# Altium PCB I2C_board_PCB.PcbDoc
Units mm, origin at the board's own origin, x right, y up, seen from the top; angles counter-clockwise.
Board outline 40.64 x 48.26 mm, 2 copper layers (Top Layer, Bottom Layer), stack 1.67 mm thick; 11 components, 21 nets, 78 pads, 0 vias.
Unrouted connection lines stored in the file: 18.
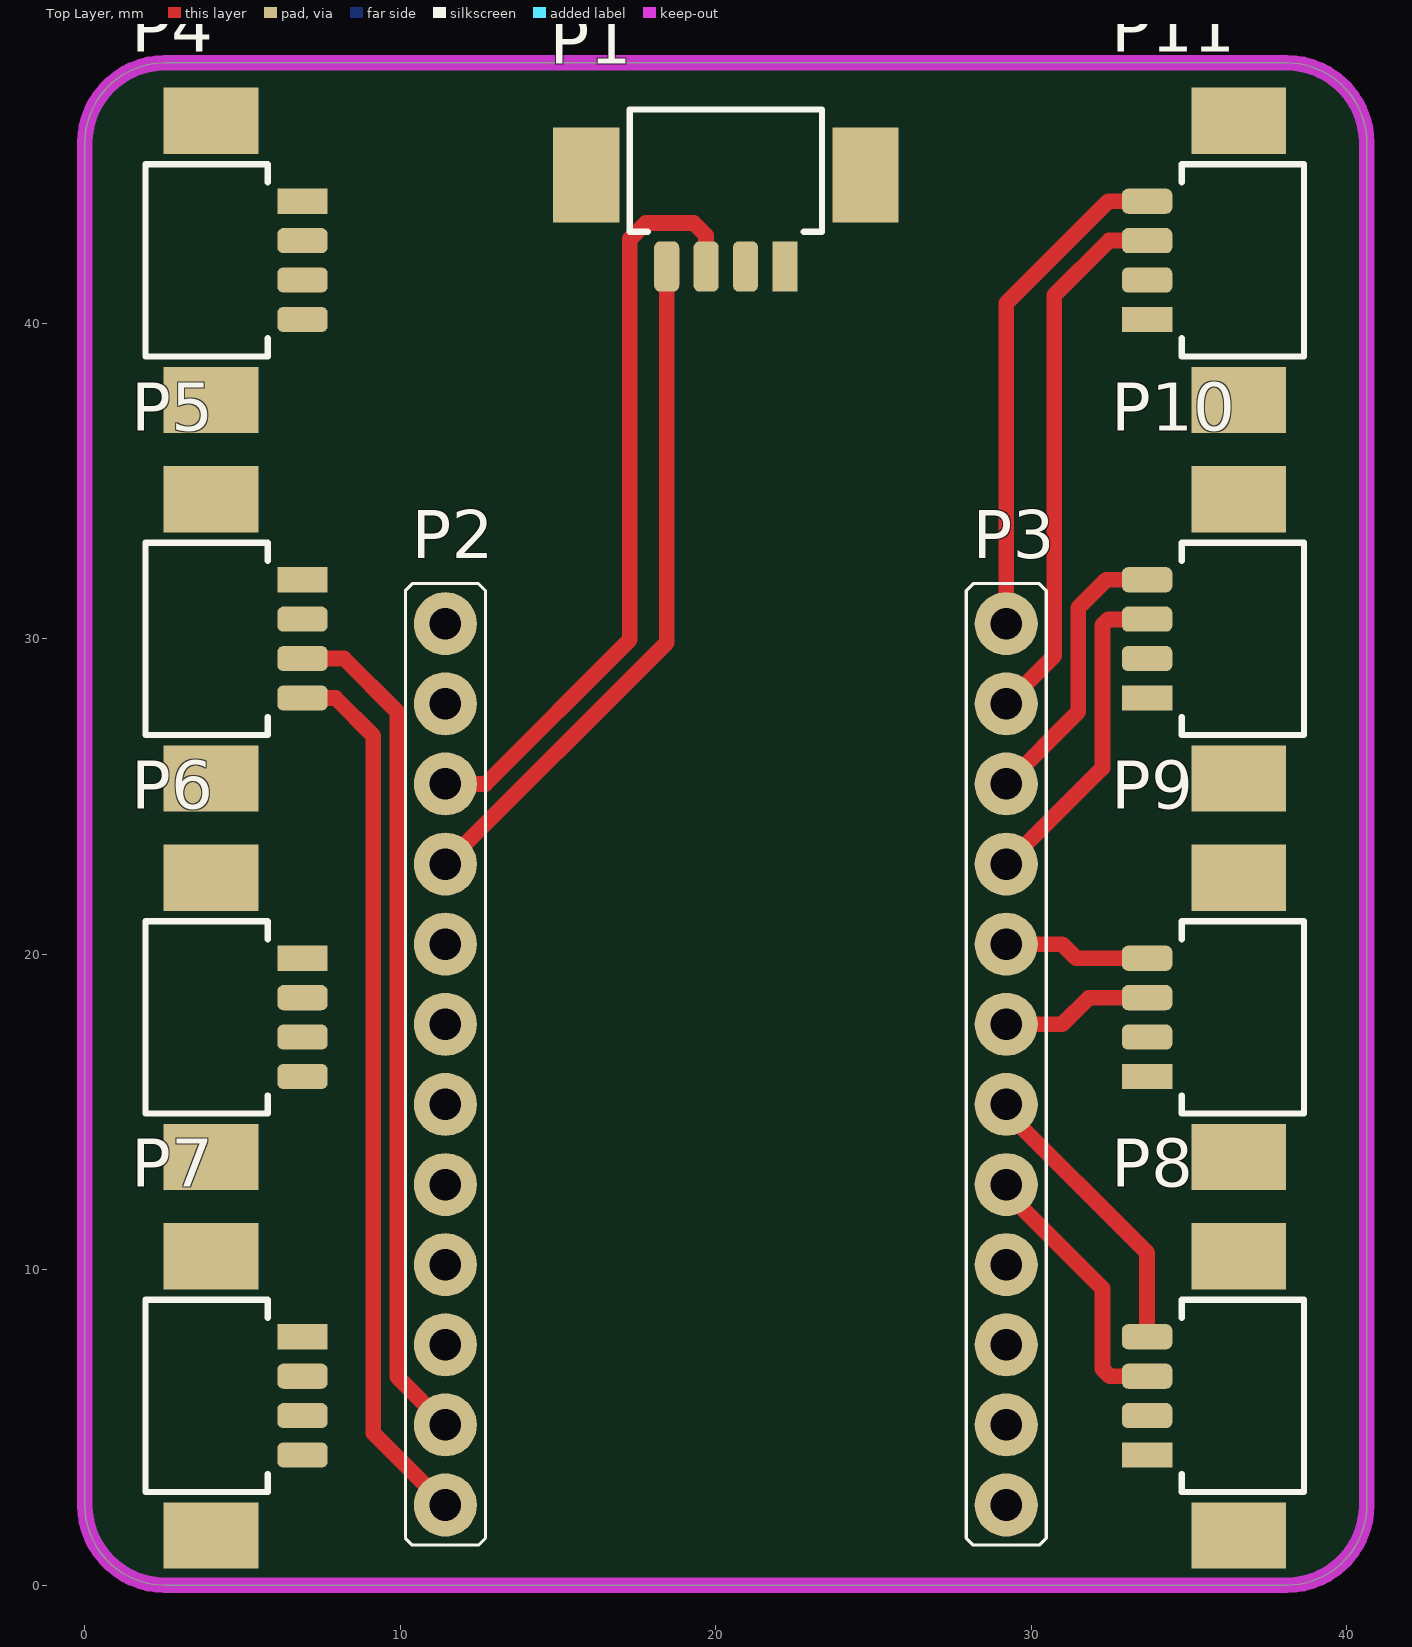
[diagram p0: Top Layer view]
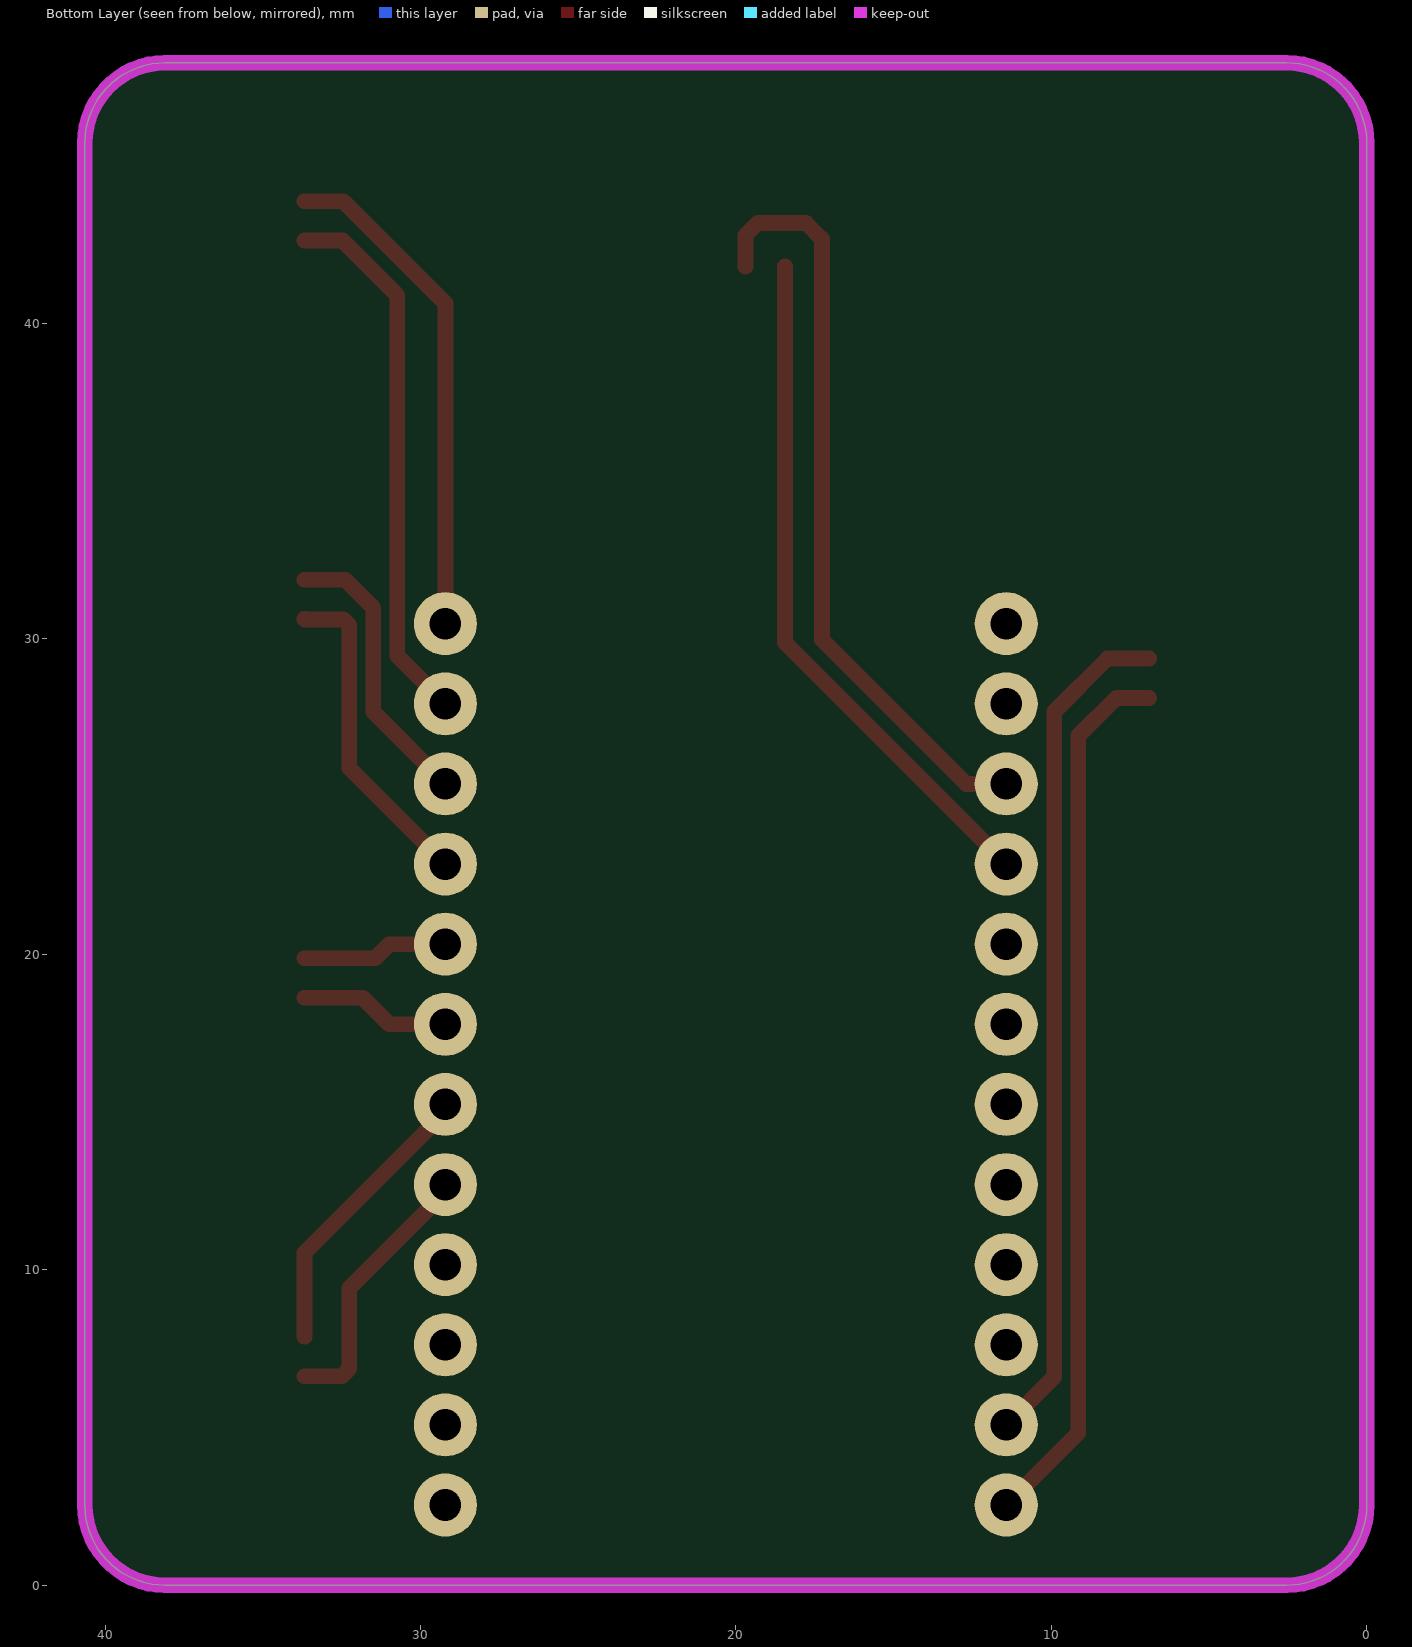
[diagram p1: Bottom Layer view, seen from below]

## Layer stack, top to bottom
Top Solder: solder mask 0.0102, Solder Resist, Dk 3.5
Top Layer: signal copper 0.035
Core: dielectric 1.6, FR-4, Dk 4.6
Bottom Layer: signal copper 0.035
Bottom Solder: solder mask 0.0102, Solder Resist, Dk 3.5

## Board outline
0,2.54 0,45.72 cw(c2.54,45.72) 2.54,48.26 38.1,48.26 cw(c38.1,45.72) 40.64,45.72 40.64,2.54 cw(c38.1,2.54) 38.1,0 2.54,0 cw(c2.54,2.54)

## Design rules (kind name [scope] priority, off if disabled: settings)
BoardOutlineClearance [All] p1: gap=0.2 ignorepadtopadclearanceinfootprint=FALSE except(0: Arc-SplitContinuation Track-SplitContinuation SMDPad-SplitContinuation THPad-SplitContinuation Via-SplitContinuation Fill-SplitContinuation Poly-SplitContinuation Region-SplitContinuation Text-SplitContinuation)
Clearance Clearance_DifferentNets [All] p1: gap=0.127 ignorepadtopadclearanceinfootprint=TRUE except(0.15: Text-Text; 0.2: Arc-SMDPad Arc-THPad Track-SMDPad Track-THPad; 0.254: Arc-Via Track-Via Via-Via; 0.5: THPad-Via)
Clearance Clearance_SameNets [All] p2: gap=0.127 ignorepadtopadclearanceinfootprint=TRUE except(0: SMDPad-Fill SMDPad-Poly SMDPad-Region Region-Region; 0.15: Text-Text; 0.2: Arc-SMDPad Arc-THPad Track-SMDPad Track-THPad; 0.254: Arc-Via Track-Via Via-Via)
DiffPairsRouting [All] p1: maxlimit=0.254 minlimit=0.203 mostfreqgap=0.203 toplayer_minwidth=0.261 toplayer_maxwidth=0.381 toplayer_prefwidth=0.261 bottomlayer_minwidth=0.261 bottomlayer_maxwidth=0.381 bottomlayer_prefwidth=0.261 maxuncoupledlength=12.7
HoleSize [All] p1: absolutevalues=TRUE maxlimit=6.3 minlimit=0.2 maxpercent=80.000 minpercent=20.000
HoleToHoleClearance [All] p1: gap=0.5 allowstackedmicrovias=TRUE
MatchedLengths USB [InDifferentialPair('USB')] p1: tolerance=0.1 checknetsindiffpair=TRUE checkdiffpairvsdiffpair=FALSE checkxsignals=FALSE checkothers=FALSE
MinimumAnnularRing [All] p1: minimumring=0.13
MinimumSolderMaskSliver [All] p1: minsoldermaskwidth=0.05
PolygonConnect [All] p1: connectstyle=Relief reliefconductorwidth=0.254 reliefentries=4 polygonreliefangle="45 Angle" airgapwidth=0.254
RoutingVias [All] p1: holewidth=0.3 width=0.6 viastyle="Through Hole" minholewidth=0.2 minwidth=0.4 maxholewidth=6.3 maxwidth=6.35
ShortCircuit [All] p1: allowed=TRUE
SilkToSilkClearance [All] p1: silktosilkclearance=0.15
SolderMaskExpansion [All] p1: expansion=0.05 istentingtop=FALSE useseparateexpansions=TRUE expansionbottom=0.05 istentingbottom=FALSE
UnRoutedNet [All] p1: checkbadconnections=TRUE
Width [All] p1: maxlimit=1 minlimit=0.09 preferedwidth=0.2 minimp=50.000000 maximp=50.000000 favimp=50.000000
23 further rules are at their usual default settings.

## Components (designator, comment, footprint, x,y, rotation, side; value= is the part's Value field where it differs from the comment)
P1 "CONN MOLEX 53261-0471 (father)" "CONN MOLEX 53261-0471 (father)" 20.32,44.704 r180 top value="CONN HEADER SMD R/A 4POS 1.25MM"
P2 "Connector 1x12 0.1\"" "CONN-12 1x12 MALE" 11.43,17.78 r270 top
P3 "Connector 1x12 0.1\"" "CONN-12 1x12 MALE" 29.21,15.24 r90 top
P4 "CONN MOLEX 53261-0471 (father)" "CONN MOLEX 53261-0471 (father)" 4,42 r270 top value="CONN HEADER SMD R/A 4POS 1.25MM"
P5 "CONN MOLEX 53261-0471 (father)" "CONN MOLEX 53261-0471 (father)" 4,30 r270 top value="CONN HEADER SMD R/A 4POS 1.25MM"
P6 "CONN MOLEX 53261-0471 (father)" "CONN MOLEX 53261-0471 (father)" 4,18 r270 top value="CONN HEADER SMD R/A 4POS 1.25MM"
P7 "CONN MOLEX 53261-0471 (father)" "CONN MOLEX 53261-0471 (father)" 4,6 r270 top value="CONN HEADER SMD R/A 4POS 1.25MM"
P8 "CONN MOLEX 53261-0471 (father)" "CONN MOLEX 53261-0471 (father)" 36.576,6 r90 top value="CONN HEADER SMD R/A 4POS 1.25MM"
P9 "CONN MOLEX 53261-0471 (father)" "CONN MOLEX 53261-0471 (father)" 36.576,18 r90 top value="CONN HEADER SMD R/A 4POS 1.25MM"
P10 "CONN MOLEX 53261-0471 (father)" "CONN MOLEX 53261-0471 (father)" 36.576,30 r90 top value="CONN HEADER SMD R/A 4POS 1.25MM"
P11 "CONN MOLEX 53261-0471 (father)" "CONN MOLEX 53261-0471 (father)" 36.576,42 r90 top value="CONN HEADER SMD R/A 4POS 1.25MM"

## Footprints (in the part's own frame and the unit in brackets; to place one, negate y for a bottom-side part, rotate by r counter-clockwise, add the part's x,y. Pads: shape width x height; smd on the part's side, far side on the other; paste and mask are expansions set on the pad)
"CONN MOLEX 53261-0471 (father)" [mm] "R/A"
  rect 0.8x1.6 smd: 1(-1.875,2.9)
  rrect50% 0.8x1.6 smd: 2(-0.625,2.9) 3(0.625,2.9) 4(1.875,2.9)
  rect 2.1x3 smd: 5(-4.425,0) 5(4.425,0)
  silkscreen extent -3.05,-2.08 3.05,1.8, body extent -5.08,-2.08 5.07,3.13, height 3.4
"CONN-12 1x12 MALE" [mm]
  round 2 hole 1: 1(-12.7,0) 2(-10.16,0) 3(-7.62,0) 4(-5.08,0) 5(-2.54,0) 6(0,0) 7(2.54,0) 8(5.08,0) 9(7.62,0) 10(10.16,0) 11(12.7,0) 12(15.24,0)
  silkscreen extent -13.97,-1.27 16.51,1.27, body extent -13.97,-1.27 16.51,1.27, height 8.54

## Part data
P1 P4 P5 P6 P7 P8 P9 P10 P11: Case="Right Angle 4 position 0.049\" (1.25mm)", Manufacturer=Molex, HelpURL=https://www.digikey.com/en/products/detail/molex/0532610471/699096?s=N4IgTCBcDaIKwGYwDYCMBaADAFgOypAF0BfIA, Model=0532610471

## Nets (pads, with @x,y where several pads share a name; then routed paths per layer and width w, separated by ;. In a path a pad name is that pad's centre, name@x,y a point inside that pad or via, vN(x,y) a via of type N, cw(c..) or ccw(c..) an arc to the next point about the centre after c; other vN are vias at no path point)
+5V: P1.2 P2.1 P2.5 P4.2 P5.2 P6.2 P7.2 P8.2 P9.2 P10.2 P11.2
A0: P2.6 P2.7 P2.8
GND: P1.1 P2.2 P4.1 P5.1 P6.1 P7.1 P8.1 P9.1 P10.1 P11.1
SC0: P2.10 P4.4
SC1: P2.12 P5.4 | length 28.1
  Top Layer w0.5: P5.4 7.943,28.125 9.144,26.924 9.144,4.826 P2.12
SC2: P3.2 P6.4
SC3: P3.4 P7.4
SC4: P3.6 P8.4 | length 9
  Top Layer w0.5: P3.6@29.21,15 33.676,10.534 P8.4
SC5: P3.8 P9.4 | length 4.7
  Top Layer w0.5: P3.8 30.988,20.32 31.433,19.875 P9.4
SC6: P3.10 P10.4 | length 9.1
  Top Layer w0.5: P3.10 31.496,27.686 31.496,30.988 32.383,31.875 P10.4
SC7: P3.12 P11.4 | length 16
  Top Layer w0.5: P3.12 29.21,40.64 32.445,43.875 P11.4
SCL: P1.4 P2.4 | length 21.8
  Top Layer w0.5: P2.4 18.445,29.875 P1.4
SD0: P2.9 P4.3
SD1: P2.11 P5.3 | length 26.9
  Top Layer w0.5: P5.3 8.217,29.375 9.906,27.686 9.906,6.604 P2.11
SD2: P3.1 P6.3
SD3: P3.3 P7.3
SD4: P3.5 P8.3 | length 8.4
  Top Layer w0.5: P3.5@29.21,12.46 32.258,9.412 32.258,6.858 32.491,6.625 P8.3
SD5: P3.7 P9.3 | length 4.8
  Top Layer w0.5: P3.7 30.988,17.78 31.833,18.625 P9.3
SD6: P3.9 P10.3 | length 10.3
  Top Layer w0.5: P3.9 32.258,25.908 32.258,30.433 32.442,30.616 33.667,30.616 P10.3
SD7: P3.11 P11.3 | length 17.2
  Top Layer w0.5: P3.11 30.734,29.464 30.734,40.894 32.465,42.625 P11.3
SDA: P1.3 P2.3 | length 24.2
  Top Layer w0.5: P2.3 12.7,25.4 17.272,29.972 17.272,42.672 17.78,43.18 19.304,43.18 19.693,42.791 19.693,41.806 P1.3
pads on no net: P1.5 P4.5 P5.5 P6.5 P7.5 P8.5 P9.5 P10.5 P11.5

## Keep-outs
Keep-Out Layer:
  the board outline again, w0.5